# Altium PCB Back Row.PcbDoc
Units mm, origin at the board's own origin, x right, y up, seen from the top; angles counter-clockwise.
Board outline 162 x 48 mm, 8 copper layers (Top Layer, Layer 2, Layer 3, Layer 4, Layer 5, Layer 6, Layer 7, Bottom Layer), stack 1.611 mm thick; 18 components, 40 nets, 191 pads, 60 vias.
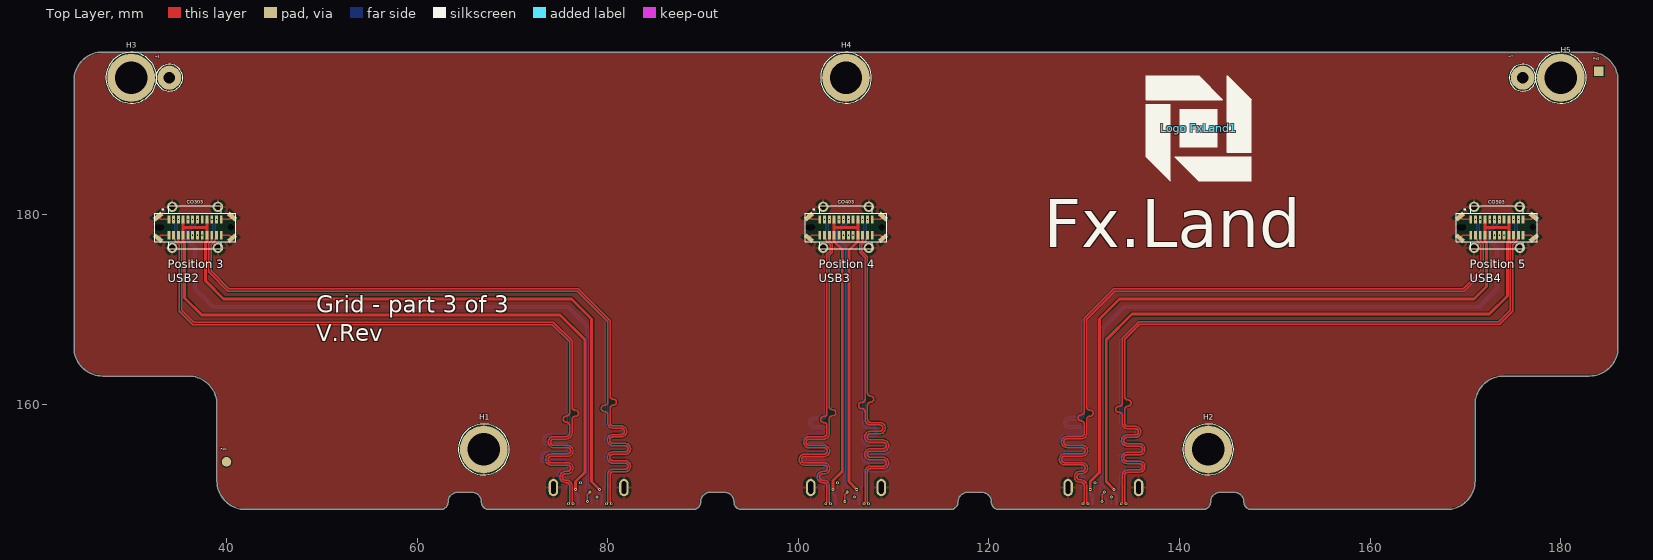
[diagram p0: Top Layer view]
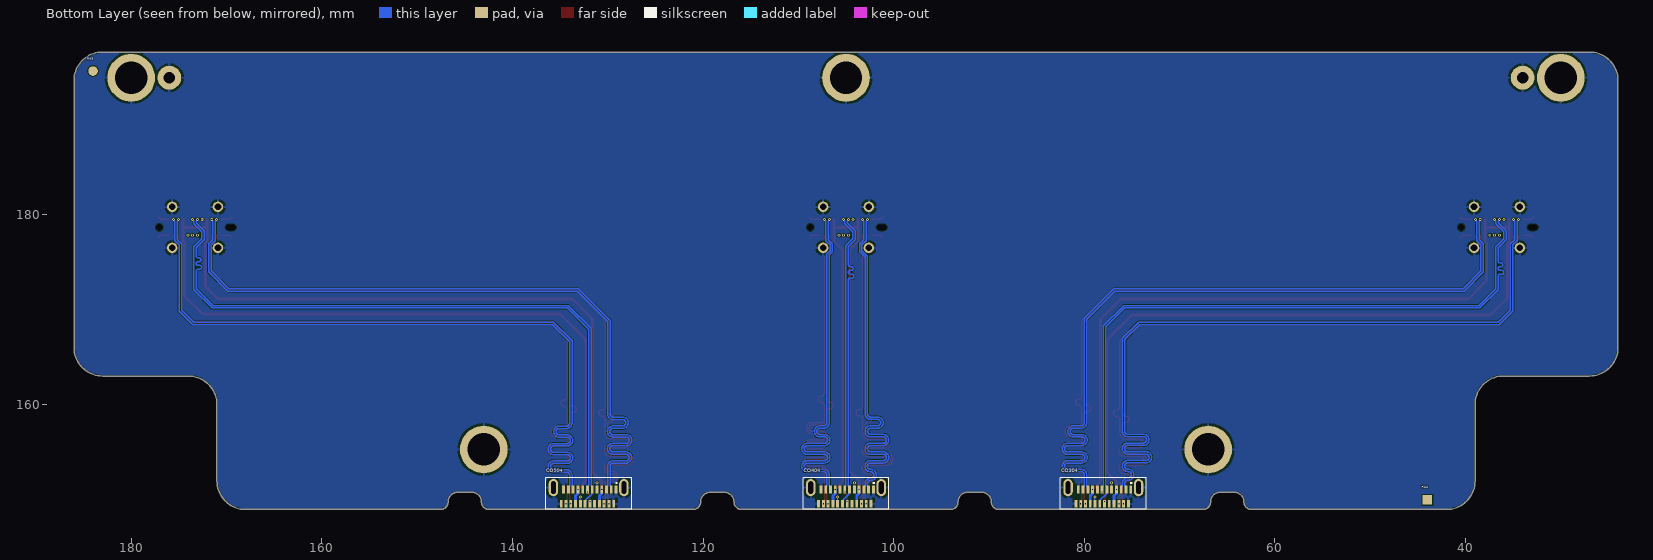
[diagram p1: Bottom Layer view, seen from below]
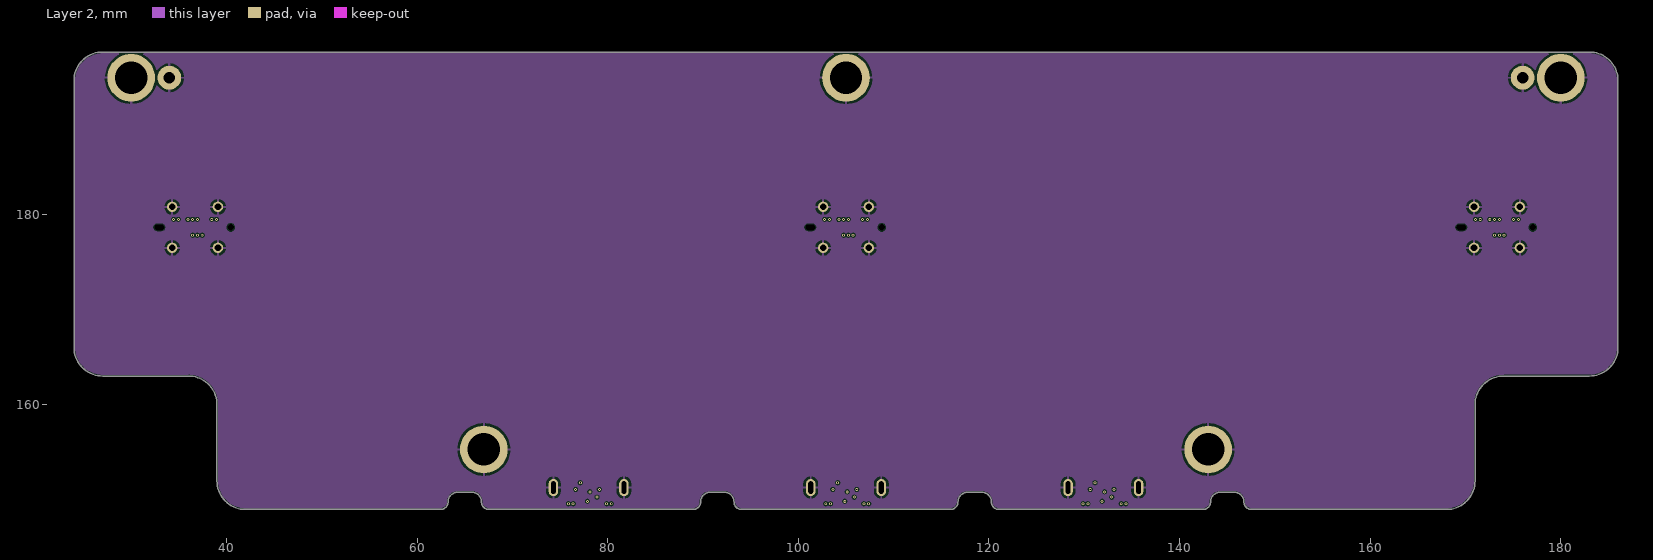
[diagram p2: Layer 2]
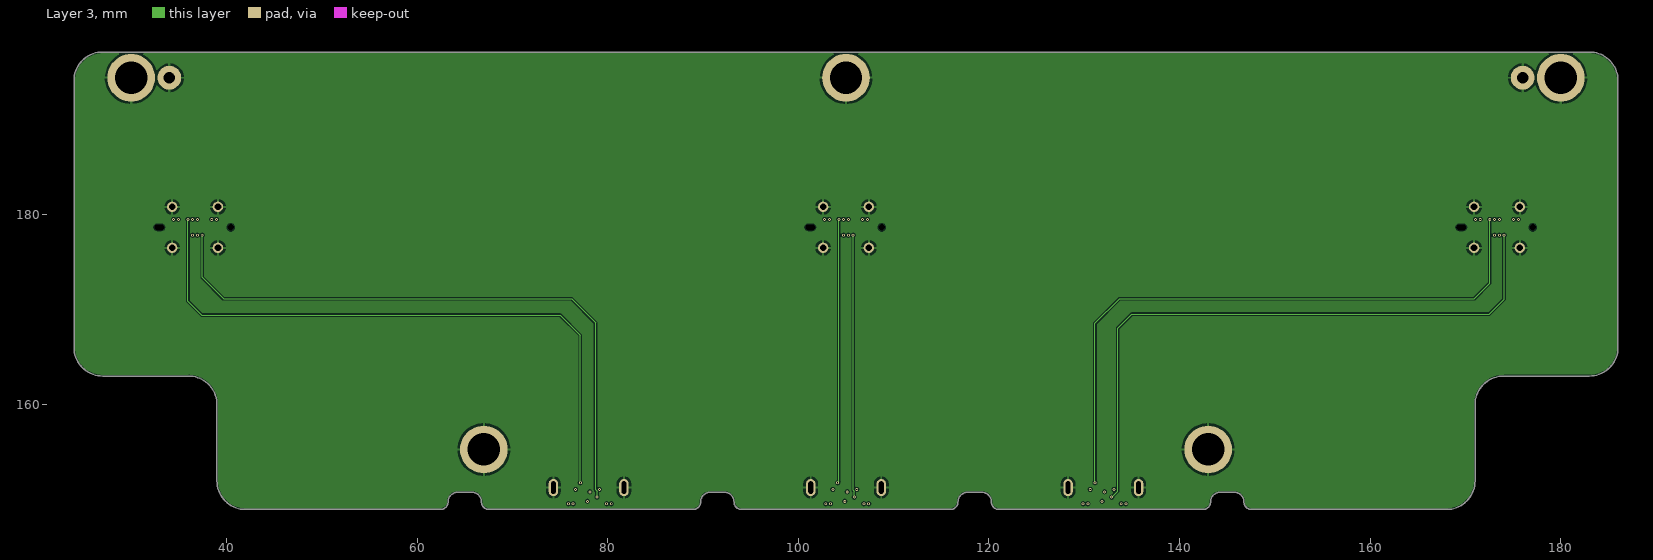
[diagram p3: Layer 3]
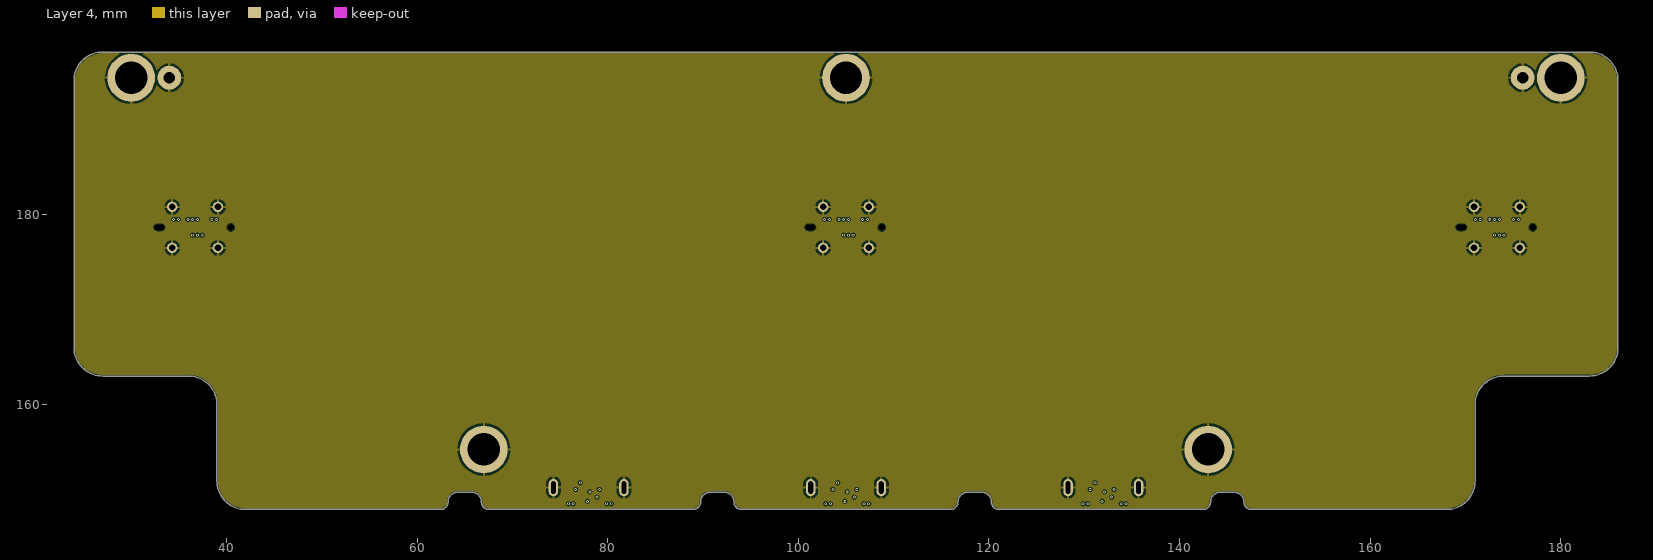
[diagram p4: Layer 4]
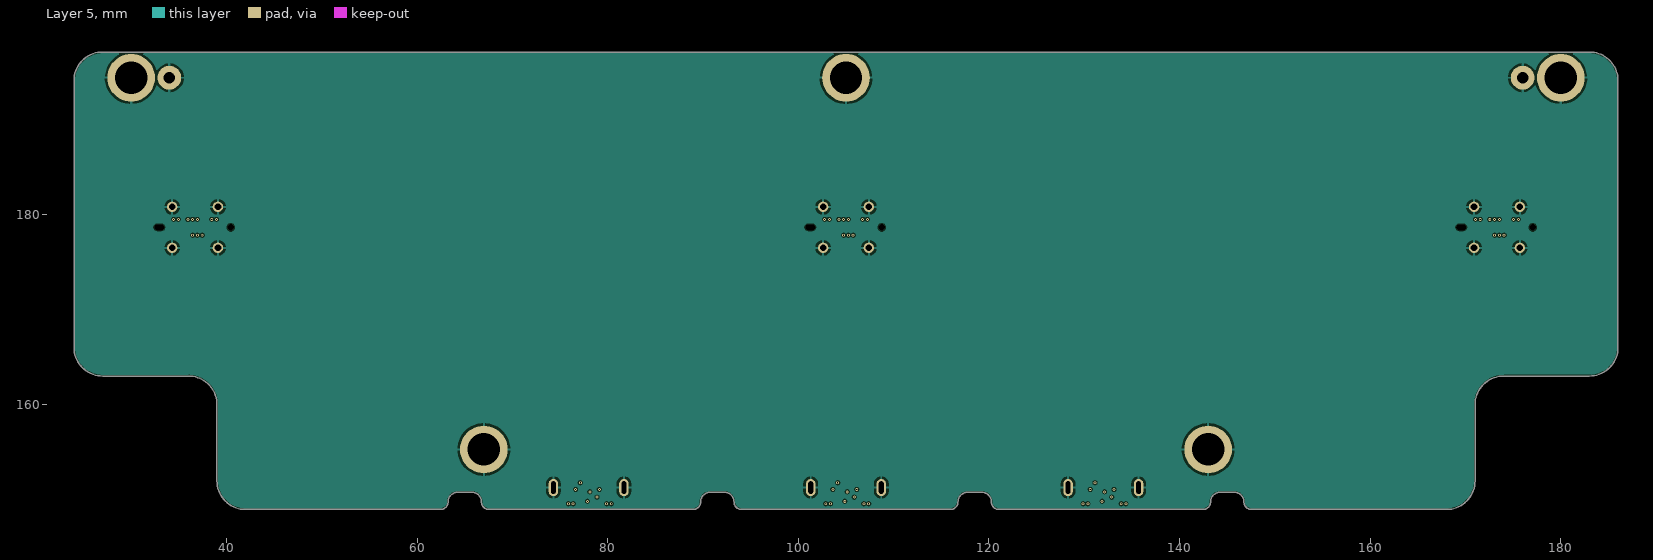
[diagram p5: Layer 5]
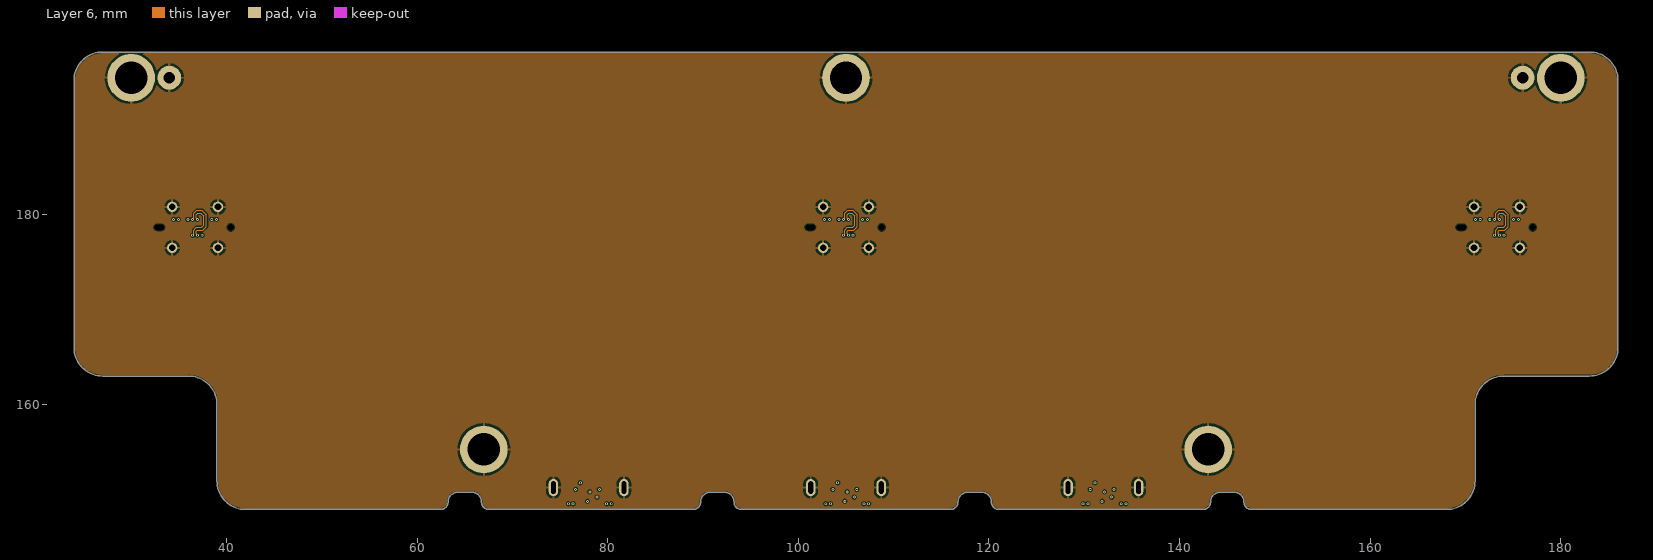
[diagram p6: Layer 6]
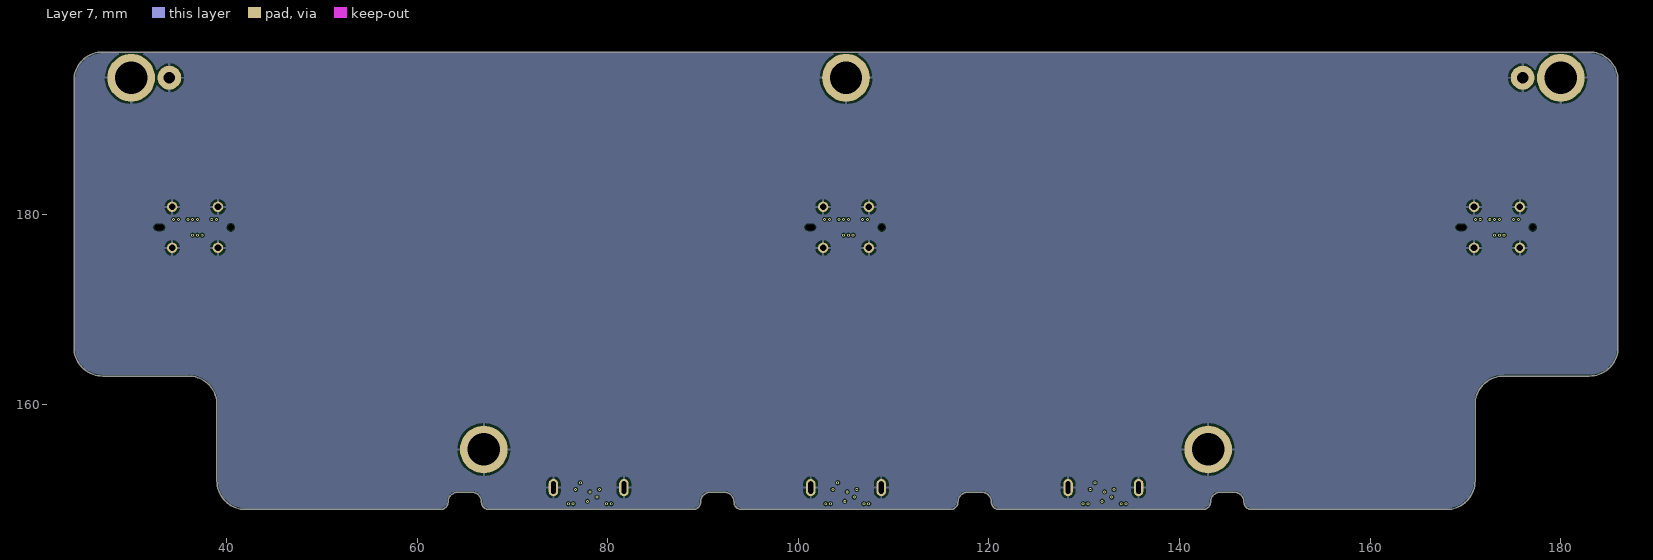
[diagram p7: Layer 7]
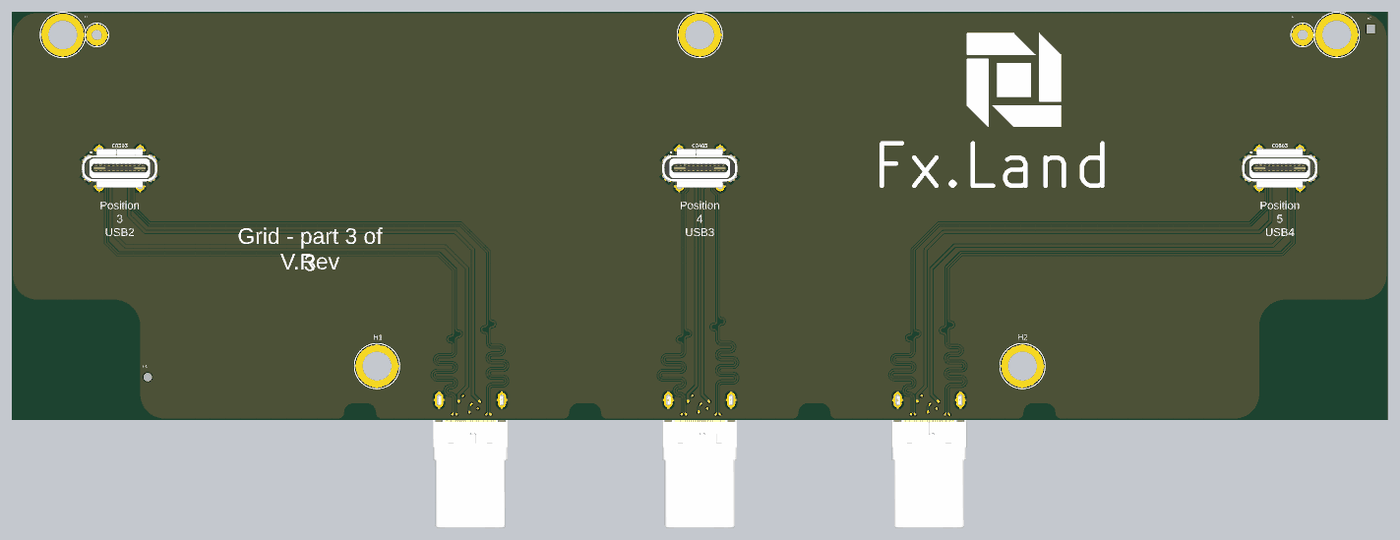
[diagram p8: 3D render of the assembled board from above, using the file's embedded part models]
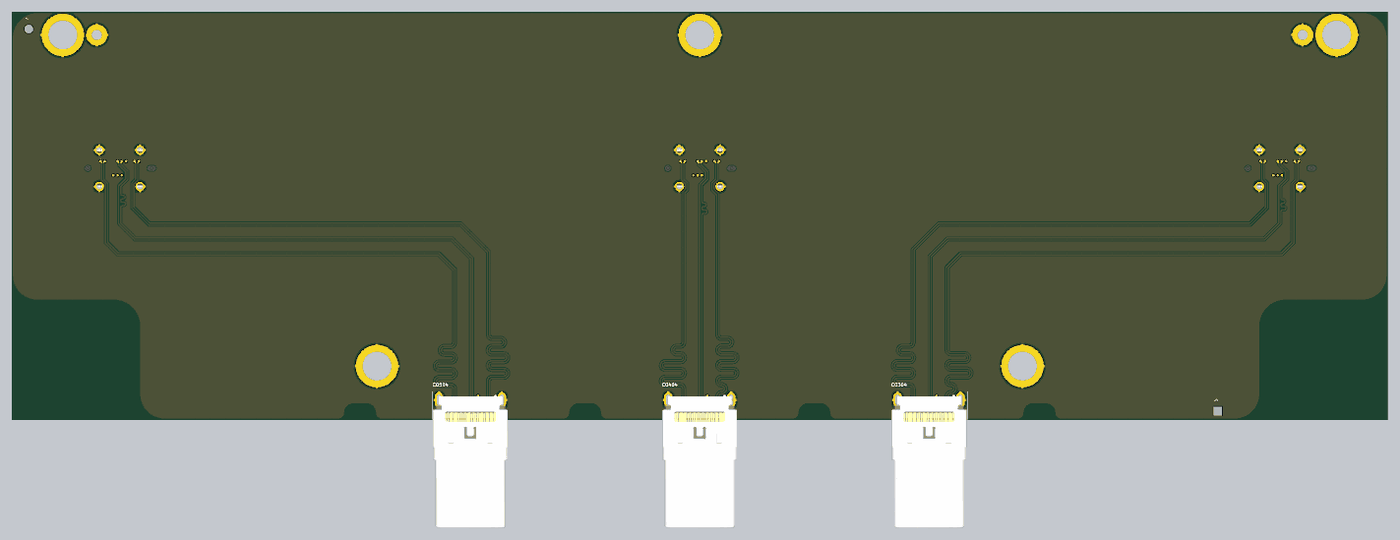
[diagram p9: 3D render of the assembled board from below, using the file's embedded part models]

## Layer stack, top to bottom
Top Solder: solder mask 0.0102, Solder Resist, Dk 3.5
Top Layer: signal copper 0.035
Dielectric 1: prepreg 0.1295, PP-017, Dk 4.3
Layer 2: signal copper 0.018
Dielectric 2: core 0.3048, Core-031, Dk 4.4
Layer 3: signal copper 0.018
Dielectric 3: prepreg 0.1295, PP-017, Dk 4.3
Layer 4: signal copper 0.018
Dielectric 4: core 0.3048, Core-031, Dk 4.4
Layer 5: signal copper 0.018
Dielectric 5: prepreg 0.1295, PP-017, Dk 4.3
Layer 6: signal copper 0.018
Dielectric 6: core 0.3048, Core-031, Dk 4.4
Layer 7: signal copper 0.018
Dielectric 7: prepreg 0.1295, PP-017, Dk 4.3
Bottom Layer: signal copper 0.035
Bottom Solder: solder mask 0.0102, Solder Resist, Dk 3.5

## Board outline
42,149 62.45,149 ccw(c62.45,149.8) 63.25,149.8 cw(c64.25,149.8) 64.25,150.8 65.75,150.8 cw(c65.75,149.8) 66.75,149.8 ccw(c67.55,149.8) 67.55,149 88.95,149 ccw(c88.95,149.8) 89.75,149.8 cw(c90.75,149.8) 90.75,150.8 92.25,150.8 cw(c92.25,149.8) 93.25,149.8 ccw(c94.05,149.8) 94.05,149 115.95,149 ccw(c115.95,149.8) 116.75,149.8 cw(c117.75,149.8) 117.75,150.8 119.25,150.8 cw(c119.25,149.8) 120.25,149.8 ccw(c121.05,149.8) 121.05,149 142.45,149 ccw(c142.45,149.8) 143.25,149.8 cw(c144.25,149.8) 144.25,150.8 145.75,150.8 cw(c145.75,149.8) 146.75,149.8 ccw(c147.55,149.8) 147.55,149 168,149 ccw(c168,152) 171,152 171,160 cw(c174,160) 174,163 183,163 ccw(c183,166) 186,166 186,194 ccw(c183,194) 183,197 27,197 ccw(c27,194) 24,194 24,166 ccw(c27,166) 27,163 36,163 cw(c36,160) 39,160 39,152 ccw(c42,152)

## Design rules (kind name [scope] priority, off if disabled: settings)
BoardOutlineClearance BoardOutlineClearanceText [OnLayer('Top Overlay')   or        OnLayer('Bottom Overlay')] p1: gap=0 ignorepadtopadclearanceinfootprint=FALSE
BoardOutlineClearance [All] p2: gap=0.127 ignorepadtopadclearanceinfootprint=FALSE except(0: Arc-SplitBarrior Arc-SplitContinuation Track-SplitBarrior Track-SplitContinuation SMDPad-SplitBarrior SMDPad-SplitContinuation THPad-SplitBarrior THPad-SplitContinuation Via-SplitBarrior Via-SplitContinuation Fill-SplitBarrior Fill-SplitContinuation Poly-SplitBarrior Poly-SplitContinuation Region-SplitBarrior Region-SplitContinuation Text-SplitBarrior Text-SplitContinuation)
Clearance Clearance_DiffPair [(InDifferentialPairClass('All Differential Pairs'))] p1: gap=0.1 ignorepadtopadclearanceinfootprint=TRUE except(0: Arc-Text Track-Text SMDPad-Text THPad-Text Via-Text Fill-Text Poly-Text Region-Text Text-Text Text-Hole)
Clearance Clearance_HighPWR [InNet('VPWR')  or   InNet('VIN') or InNet('PWR')] p2: gap=0.3 ignorepadtopadclearanceinfootprint=FALSE except(0: Arc-Text Track-Text SMDPad-Text THPad-Text Via-Text Fill-Text Poly-Text Region-Text Text-Text Text-Hole)
Clearance Clearance_MidPWR [InNet('+12V') or InNet('+5V')] p3: gap=0.2 ignorepadtopadclearanceinfootprint=TRUE except(0: Arc-Text Track-Text SMDPad-Text THPad-Text Via-Text Fill-Text Poly-Text Region-Text Text-Text Text-Hole)
Clearance Clearance_LowPWR [InNet('NetC104_1')] p4: gap=0.15 ignorepadtopadclearanceinfootprint=TRUE except(0: Arc-Text Track-Text SMDPad-Text THPad-Text Via-Text Fill-Text Poly-Text Region-Text Text-Text Text-Hole)
Clearance Clearance_DiffNets [All] p5: gap=0.105 ignorepadtopadclearanceinfootprint=TRUE except(0: Arc-Text Track-Text SMDPad-Text THPad-Text Via-Text Fill-Text Poly-Text Region-Text Text-Text Text-Hole)
Clearance Clearance_SameNets [All] p6: gap=0 ignorepadtopadclearanceinfootprint=FALSE
ComponentClearance [All] p1: gap=0 collisioncheckmode=3 verticalgap=0 showdistances=FALSE
DiffPairsRouting DiffPairsRouting_USB3 [InDifferentialPairClass('USB3')] p1: maxlimit=0.35 minlimit=0.1 mostfreqgap=0.17 toplayer_mingap=0.105 toplayer_maxgap=0.105 toplayer_prefgap=0.105 toplayer_minwidth=0.15 toplayer_maxwidth=0.15 toplayer_prefwidth=0.15 midlayer2_mingap=0.17 midlayer2_maxgap=0.17 midlayer2_minwidth=0.125 midlayer2_maxwidth=0.125 midlayer2_prefwidth=0.125 midlayer3_mingap=0.17 midlayer3_maxgap=0.17 midlayer3_minwidth=0.125 midlayer3_maxwidth=0.125 midlayer3_prefwidth=0.125 bottomlayer_mingap=0.105 bottomlayer_maxgap=0.105 bottomlayer_prefgap=0.105 bottomlayer_minwidth=0.15 bottomlayer_maxwidth=0.15 bottomlayer_prefwidth=0.15 impedanceprofiledriven=TRUE impedanceprofileid={6759D886-137E-4B91-9245-95823A6983B5} impedanceprofilevalue=90.000000 filterlayerstackid={976BEA40-2DA4-42A2-9577-73BD5A797D81} maxuncoupledlength=12.7
DiffPairsRouting DiffPairsRouting_USB [InDifferentialPairClass('USB')] p2: maxlimit=0.35 minlimit=0.1 mostfreqgap=0.17 toplayer_mingap=0.105 toplayer_maxgap=0.105 toplayer_prefgap=0.105 toplayer_minwidth=0.15 toplayer_maxwidth=0.15 toplayer_prefwidth=0.15 midlayer2_mingap=0.17 midlayer2_maxgap=0.17 midlayer2_minwidth=0.125 midlayer2_maxwidth=0.125 midlayer2_prefwidth=0.125 midlayer3_mingap=0.17 midlayer3_maxgap=0.17 midlayer3_minwidth=0.125 midlayer3_maxwidth=0.125 midlayer3_prefwidth=0.125 bottomlayer_mingap=0.105 bottomlayer_maxgap=0.105 bottomlayer_prefgap=0.105 bottomlayer_minwidth=0.15 bottomlayer_maxwidth=0.15 bottomlayer_prefwidth=0.15 impedanceprofiledriven=TRUE impedanceprofileid={6759D886-137E-4B91-9245-95823A6983B5} impedanceprofilevalue=90.000000 filterlayerstackid={976BEA40-2DA4-42A2-9577-73BD5A797D81} maxuncoupledlength=12.7
Height [All] p1: minheight=0 maxheight=100 prefheight=12.7
HoleSize [All] p1: absolutevalues=TRUE maxlimit=20 minlimit=0.025 maxpercent=80.000 minpercent=20.000
HoleToHoleClearance [All] p1: gap=0.125 allowstackedmicrovias=TRUE
MatchedLengths MatchedLengthsUSB [InDifferentialPairClass('USB3')] p1: tolerance=0.127 checknetsindiffpair=TRUE checkdiffpairvsdiffpair=FALSE checkxsignals=FALSE checkothers=FALSE
MatchedLengths MatchedLengthsUSB0 [InDifferentialPair('USB0') or InDifferentialPair('USB0_RX1') or InDifferentialPair('USB0_RX2') or InDifferentialPair('USB0_TX1') or InDifferentialPair('USB0_TX2')] p2: tolerance=1.27 checknetsindiffpair=FALSE checkdiffpairvsdiffpair=TRUE checkxsignals=TRUE checkothers=TRUE
MatchedLengths MatchedLengthsUSB1 [InDifferentialPair('USB1') or InDifferentialPair('USB1_RX1') or InDifferentialPair('USB1_RX2') or InDifferentialPair('USB1_TX1') or InDifferentialPair('USB1_TX2')] p3: tolerance=1.27 checknetsindiffpair=FALSE checkdiffpairvsdiffpair=TRUE checkxsignals=TRUE checkothers=TRUE
MatchedLengths MatchedLengthsUSB2 [InDifferentialPair('USB2') or InDifferentialPair('USB2_RX1') or InDifferentialPair('USB2_RX2') or InDifferentialPair('USB2_TX1') or InDifferentialPair('USB2_TX2')] p4: tolerance=1.27 checknetsindiffpair=FALSE checkdiffpairvsdiffpair=TRUE checkxsignals=TRUE checkothers=TRUE
MatchedLengths MatchedLengthsUSB3 [InDifferentialPair('USB3') or InDifferentialPair('USB3_RX1') or InDifferentialPair('USB3_RX2') or InDifferentialPair('USB3_TX1') or InDifferentialPair('USB3_TX2')] p5: tolerance=1.27 checknetsindiffpair=FALSE checkdiffpairvsdiffpair=TRUE checkxsignals=TRUE checkothers=TRUE
MatchedLengths MatchedLengthsUSB4 [InDifferentialPair('USB4') or InDifferentialPair('USB4_RX1') or InDifferentialPair('USB4_RX2') or InDifferentialPair('USB4_TX1') or InDifferentialPair('USB4_TX2')] p6: tolerance=1.27 checknetsindiffpair=FALSE checkdiffpairvsdiffpair=TRUE checkxsignals=TRUE checkothers=TRUE
MatchedLengths MatchedLengthsUSB5 [InDifferentialPair('USB5') or InDifferentialPair('USB5_RX1') or InDifferentialPair('USB5_RX2') or InDifferentialPair('USB5_TX1') or InDifferentialPair('USB5_TX2')] p7: tolerance=1.27 checknetsindiffpair=FALSE checkdiffpairvsdiffpair=TRUE checkxsignals=TRUE checkothers=TRUE
MatchedLengths MatchedLengthsUSB6 [InDifferentialPair('USB6') or InDifferentialPair('USB6_RX1') or InDifferentialPair('USB6_RX2') or InDifferentialPair('USB6_TX1') or InDifferentialPair('USB6_TX2')] p8: tolerance=1.27 checknetsindiffpair=FALSE checkdiffpairvsdiffpair=TRUE checkxsignals=TRUE checkothers=TRUE
MatchedLengths MatchedLengthsUSB7 [InDifferentialPair('USB7') or InDifferentialPair('USB7_RX1') or InDifferentialPair('USB7_RX2') or InDifferentialPair('USB7_TX1') or InDifferentialPair('USB7_TX2')] p9: tolerance=1.27 checknetsindiffpair=FALSE checkdiffpairvsdiffpair=TRUE checkxsignals=TRUE checkothers=TRUE
MinimumAnnularRing [All] p1: minimumring=0.1
MinimumSolderMaskSliver [All] p1: minsoldermaskwidth=0
PolygonConnect PolygonConnect_HighPWR [InNet('VPWR')  or   InNet('VIN') or InNet('PWR')] p1: connectstyle=Relief reliefconductorwidth=1.25 reliefentries=4 polygonreliefangle="90 Angle" airgapwidth=0.254
PolygonConnect PolygonConnect_MidPWR [InNet('+12V') or InNet('+5V')] p2: connectstyle=Relief reliefconductorwidth=0.7 reliefentries=4 polygonreliefangle="90 Angle" airgapwidth=0.254
PolygonConnect PolygonConnect_LowPWR [InNet('NetC104_1')] p3: connectstyle=Relief reliefconductorwidth=0.5 reliefentries=4 polygonreliefangle="90 Angle" airgapwidth=0.254
PolygonConnect [All] p4: connectstyle=Relief reliefconductorwidth=0.254 reliefentries=4 polygonreliefangle="90 Angle" airgapwidth=0.254
RoutingVias RoutingVias_DiffPair [InDifferentialPairClass('All Differential Pairs')] p1: holewidth=0.1 width=0.3 viastyle="Through Hole" minholewidth=0.1 minwidth=0.3 maxholewidth=0.5 maxwidth=0.6
RoutingVias [All] p2: holewidth=0.1 width=0.3 viastyle="Through Hole" minholewidth=0.1 minwidth=0.3 maxholewidth=6.3 maxwidth=6.9
SilkToSilkClearance [All] p1: silktosilkclearance=0
SilkToSolderMaskClearance [IsPad] p1: minsilkscreentomaskgap=0 clearancetoexposedcopper=TRUE
SolderMaskExpansion [All] p1: expansion=0.102 istentingtop=FALSE
UnRoutedNet [All] p1: checkbadconnections=TRUE
Width Width_12V [InNet('+12V')] p1: maxlimit=2 minlimit=0.75 preferedwidth=1
Width Width_VIN [InNet('VIN')] p2: maxlimit=2 minlimit=0.75 preferedwidth=1
Width Width_VPWR [InNet('VPWR')] p3: maxlimit=2 minlimit=0.5 preferedwidth=0.7
Width [All] p4: maxlimit=20 minlimit=0.1 preferedwidth=0.254
21 further rules are at their usual default settings.

## Classes and differential pairs
differential pair class USB3: USB1 USB1_RX1 USB1_RX2 USB1_TX1 USB1_TX2 USB2 USB2_RX1 USB2_RX2 USB2_TX1 USB2_TX2 USB3 USB3_RX1 USB3_RX2 USB3_TX1 USB3_TX2 USB4 USB4_RX1 USB4_RX2 USB4_TX1 USB4_TX2 USB5 USB5_RX1 USB5_RX2 USB5_TX1 USB5_TX2 USB6 USB6_RX1 USB6_RX2 USB6_TX1 USB6_TX2
component class "Grid Position 5/8": CO503 CO504
component class "Grid Position 4/8": CO403 CO404
component class "Grid Position 3/8": CO303 CO304
component class 001_OverViewGridMod3V3: Fid1 Fid2 Fid3 Fid4 H1 H2 H3 H4 H5 H6 H7 "Logo FxLand1"
differential pair USB4: +USB4_P -USB4_N
differential pair USB4_TX2: +USB4_TX2_P -USB4_TX2_N
differential pair USB4_TX1: +USB4_TX1_P -USB4_TX1_N
differential pair USB4_RX2: +USB4_RX2_P -USB4_RX2_N
differential pair USB4_RX1: +USB4_RX1_P -USB4_RX1_N
differential pair USB3: +USB3_P -USB3_N
differential pair USB3_TX2: +USB3_TX2_P -USB3_TX2_N
differential pair USB3_TX1: +USB3_TX1_P -USB3_TX1_N
differential pair USB3_RX2: +USB3_RX2_P -USB3_RX2_N
differential pair USB3_RX1: +USB3_RX1_P -USB3_RX1_N
differential pair USB2: +USB2_P -USB2_N
differential pair USB2_TX2: +USB2_TX2_P -USB2_TX2_N
differential pair USB2_TX1: +USB2_TX1_P -USB2_TX1_N
differential pair USB2_RX2: +USB2_RX2_P -USB2_RX2_N
differential pair USB2_RX1: +USB2_RX1_P -USB2_RX1_N

## Components (designator, comment, footprint, x,y, rotation, side; value= is the part's Value field where it differs from the comment)
CO303 "USB4070" USB4070-30-C 36.7,178.6 r0 top locked
CO304 "USB4155" USB4155-03-C 78,149 r180 bottom locked
CO403 "USB4070" USB4070-30-C 105,178.6 r0 top locked
CO404 "USB4155" USB4155-03-C 105,149 r180 bottom locked
CO503 "USB4070" USB4070-30-C 173.3,178.6 r0 top locked
CO504 "USB4155" USB4155-03-C 132,149 r180 bottom locked
Fid1 "Fiducial" FidR_1.0mm 40,154 r0 top
Fid2 "Fiducial" FidS_1.0mm 184,195 r0 top
Fid3 "Fiducial" FidR_1.0mm 184,195 r180 bottom
Fid4 "Fiducial" FidS_1.0mm 44,150 r180 bottom
H1 "Hole M3" HOLE_M3 67,155.3 r0 top locked
H2 "Hole M3" HOLE_M3 143,155.3 r0 top locked
H3 "Hole M3" HOLE_M3 30,194.3 r0 top locked
H4 "Hole M3" HOLE_M3 105,194.3 r0 top locked
H5 "Hole M3" HOLE_M3 180,194.3 r0 top locked
H6 "Hole 1.2mm" HOLE_1.2MM 34,194.3 r0 top locked
H7 "Hole 1.2mm" HOLE_1.2MM 176,194.3 r0 top locked
"Logo FxLand1" "FxLand" Logo_FxLand_3 142,189 r0 top

## Footprints (in the part's own frame and the unit in brackets; to place one, negate y for a bottom-side part, rotate by r counter-clockwise, add the part's x,y. Pads: shape width x height; smd on the part's side, far side on the other; paste and mask are expansions set on the pad)
FidR_1.0mm [mm]
  round 1 smd: 1(0,0)
FidS_1.0mm [mm]
  rect 1x1 smd: 1(0,0)
HOLE_1.2MM [mm]
  round 2.5 hole 1.2: 1(0,0)
  silkscreen extent -1.4,-1.4 1.4,1.4
HOLE_M3 [mm]
  round 5 hole 3.4: 1(0,0)
  silkscreen extent -2.66,-2.66 2.67,2.66
Logo_FxLand_3 [mm]
  silkscreen extent -5.5,-5.5 5.5,5.5
USB4070-30-C [mm]
  round 0 hole 0.58 slot 1 at 0 deg unplated mask+0: 0(-3.75,0)
  round 0 hole 0.66 unplated mask+0: 0(3.75,0)
  rect 0.3x0.85 smd: 1(-2.75,0.83) 2(-2.25,0.83) 3(-1.75,0.83) 4(-1.25,0.83) 5(-0.75,0.83) 6(-0.25,0.83) 7(0.25,0.83) 8(0.75,0.83) 9(1.25,0.83) 10(1.75,0.83) 11(2.25,0.83) 12(2.75,0.83) 21(2.75,-0.83) 22(2.25,-0.83) 23(1.75,-0.83) 24(1.25,-0.83) 25(0.75,-0.83) 26(0.25,-0.83) 27(-0.25,-0.83) 28(-0.75,-0.83) 29(-1.25,-0.83) 30(-1.75,-0.83) 31(-2.25,-0.83) 32(-2.75,-0.83)
  rect 0.5x1.03 smd rot 50: SH(-3.88,-1.135) SH(3.88,1.135)
  rect 0.5x1.03 smd rot 130: SH(-3.88,1.135) SH(3.88,-1.135)
  round 1.1 hole 0.7: SH(-2.4,-2.15) SH(-2.4,2.15) SH(2.4,-2.15) SH(2.4,2.15)
  silkscreen extent -4.25,-2.25 4.25,2.25, body extent -4.44,-2.27 4.43,2.28, height 10.54
USB4155-03-C [mm]
  rect 0.3x0.8 smd: 1(2.875,2.1) 2(2.375,2.1) 3(1.875,2.1) 4(1.375,2.1) 5(0.875,2.1) 6(0.375,2.1) 7(-0.125,2.1) 8(-0.625,2.1) 9(-1.125,2.1) 10(-1.625,2.1) 11(-2.125,2.1) 12(-2.625,2.1) 21(-2.875,0.6) 22(-2.375,0.6) 23(-1.875,0.6) 24(-1.375,0.6) 25(-0.875,0.6) 26(-0.375,0.6) 27(0.125,0.6) 28(0.625,0.6) 29(1.125,0.6) 30(1.625,0.6) 31(2.125,0.6) 32(2.625,0.6)
  oval 1x1.8 hole 0.5 slot 1.3 at 90 deg: SH(-3.7,2.3) SH(3.7,2.3)
  silkscreen extent -4.5,0 4.5,3.33, body extent -4.4,-12.75 4.4,2.75, height 1.6

## Part data
CO303 CO403 CO503: library part CO0021, "USB C connector Receptacle Vertical", ID=16, ManfactPart=USB4070-30-C, Part Number=CO0021, RefVal=USB4070
CO304 CO404 CO504: library part CO0031, "USB C connector Plug Horizontal", ID=30, ManfactPart=USB4155-03-C, Part Number=CO0031, RefVal=USB4155
Fid1 Fid3: library part ME0011, "Fiducial Round 1mm", ID=11, Part Number=ME0011, RefVal=Fiducial
Fid2 Fid4: library part ME0012, "Fiducial Sqaure 1mm", ID=12, Part Number=ME0012, RefVal=Fiducial
H1 H2 H3 H4 H5: library part ME0001, "Mounting Hole M3", ID=1, Part Number=ME0001, RefVal="Hole M3"
H6 H7: library part ME0025, "Mounting Hole 1.2MM", ID=25, Part Number=ME0025, RefVal="Hole 1.2mm"
"Logo FxLand1": library part ME0008, "Logo FxLand 3", ID=8, Part Number=ME0008, RefVal=FxLand

## Via types
v1: diameter 0.3, hole 0.1, Top Layer to Bottom Layer, 60 vias

## Nets (pads, with @x,y where several pads share a name; then routed paths per layer and width w, separated by ;. In a path a pad name is that pad's centre, name@x,y a point inside that pad or via, vN(x,y) a via of type N, cw(c..) or ccw(c..) an arc to the next point about the centre after c; other vN are vias at no path point)
GND: CO303.1 CO303.12 CO303.21 CO303.32 CO303.SH CO304.1 CO304.12 CO304.21 CO304.32 CO304.SH CO403.1 CO403.12 CO403.21 CO403.32 CO403.SH CO404.1 CO404.12 CO404.21 CO404.32 CO404.SH CO503.1 CO503.12 CO503.21 CO503.32 CO503.SH CO504.1 CO504.12 CO504.21 CO504.32 CO504.SH H1.1 H2.1 H3.1 H4.1 H5.1 H6.1 H7.1 | length 15.1
  Top Layer w0.15: CO303.SH@32.82,177.465 33.125,177.77 CO303.32 ; CO303.SH@32.82,179.735 33.125,179.43 CO303.1 ; CO303.21 40.275,177.77 CO303.SH@40.58,177.465 ; CO303.12 40.275,179.43 CO303.SH@40.58,179.735 ; CO403.SH@101.12,177.465 101.425,177.77 CO403.32 ; CO403.SH@101.12,179.735 101.425,179.43 CO403.1 ; CO403.21 108.575,177.77 CO403.SH@108.88,177.465 ; CO403.12 108.575,179.43 CO403.SH@108.88,179.735 ; CO503.SH@169.42,177.465 169.725,177.77 CO503.32 ; CO503.SH@169.42,179.735 169.725,179.43 CO503.1 ; CO503.21 176.875,177.77 CO503.SH@177.18,177.465 ; CO503.12 176.875,179.43 CO503.SH@177.18,179.735
USB2_5V: CO303.4 CO303.9 CO303.24 CO303.29 CO304.4 CO304.9 CO304.24 CO304.29 | length 140.8
  Top Layer w0.3: CO303.4 35.45,178.6 ; CO303.9 37.95,178.6 ; v1(76.625,151.1) 76.625,151.925 77.6,152.9 77.6,166.8 75,169.4 37.4,169.4 35.605,171.195 35.605,176.991 35.45,177.146 CO303.29 35.45,178.6 ; v1(79.125,151.1) 78.3,151.925 78.3,169 76.2,171.1 39.7,171.1 37.795,173.005 37.795,176.991 37.95,177.146 CO303.24 37.95,178.6 ; 35.45,178.6 37.95,178.6
  Bottom Layer w0.3: v1(76.625,151.1) 76.625,150.689 76.875,150.439 CO304.29 ; v1(79.125,151.1) 79.125,150.689 79.375,150.439 CO304.24
USB2_CC1: CO303.5 CO304.5 | length 67.4
  Layer 3 w0.125: v1(35.95,179.43) 35.95,170.85 37.4,169.4 75,169.4 77.125,167.275 v1(77.125,151.8)
  Bottom Layer w0.125: CO304.5 v1(77.125,151.8)
USB2_CC2: CO303.25 CO304.25 | length 66.7
  Layer 3 w0.125: v1(37.45,177.77) 37.45,173.35 39.7,171.1 76.2,171.1 78.725,168.575 78.725,151.051 78.875,150.901 v1(78.875,150.3)
  Bottom Layer w0.125: CO304.25 v1(78.875,150.3)
USB2_N: CO303.7 CO303.27 CO304.7 CO304.27 | length 73.4
  Top Layer w0.15: v1(77.875,149.85) 77.875,150.57 78.125,150.82 v1(78.125,150.85)
  Layer 6 w0.125: v1(36.45,177.77) 36.45,177.817 36.552,177.92 36.552,178.322 36.825,178.595 37.395,178.595 37.6,178.8 37.6,179.8 37.4,180 37.3,180.1 37,180.1 36.848,179.948 36.848,179.58 36.95,179.477 v1(36.95,179.43)
  Bottom Layer w0.15: v1(36.95,179.43) 36.95,179.39 36.828,179.267 36.828,178.967 36,178.139 36,177.4 36.828,176.573 36.828,172.173 38.6,170.4 75.861,170.4 78.003,168.258 78.003,151.473 78.125,151.35 CO304.7
USB2_P: CO303.6 CO303.26 CO304.6 CO304.26 | length 76.6
  Layer 6 w0.125: v1(36.45,179.43) 36.45,179.477 36.552,179.58 36.552,180.07 36.878,180.395 37.422,180.395 37.895,179.922 37.895,178.678 37.517,178.3 36.948,178.3 36.848,178.2 36.848,177.92 36.95,177.817 v1(36.95,177.77)
  Bottom Layer w0.15: v1(36.45,179.43) 36.45,179.39 36.572,179.267 36.572,179.073 35.745,178.245 35.745,177.294 36.572,176.467 36.572,176.1 36.572,175.091 cw(c36.371,175.091) 36.371,174.889 36.285,174.889 ccw(c36.285,174.687) 36.083,174.687 ccw(c36.285,174.687) 36.285,174.485 36.371,174.485 cw(c36.371,174.283) 36.572,174.283 cw(c36.371,174.283) 36.371,174.081 36.184,174.081 ccw(c36.184,173.879) 35.982,173.879 ccw(c36.184,173.879) 36.184,173.677 36.371,173.677 cw(c36.371,173.475) 36.572,173.475 36.572,173.4 36.572,172.067 38.494,170.145 75.755,170.145 77.748,168.152 77.748,151.473 77.625,151.35 CO304.6 77.7,151.025 77.7,150.6 78.3,150 78.3,149.675 CO304.26
USB2_RX1_N: CO303.30 CO304.30 | length 77.9
  Top Layer w0.15: CO303.30 34.928,177.748 34.928,177.208 35.28,176.856 35.28,169.92 36.545,168.655 74.306,168.655 76.252,166.708 76.252,160.203 76.252,159.751 ccw(c76.581,159.751) 76.581,159.422 76.609,159.422 cw(c76.609,159.093) 76.938,159.093 cw(c76.609,159.093) 76.609,158.764 76.581,158.764 ccw(c76.581,158.435) 76.252,158.435 76.252,157.702 76.252,157.676 76.252,156.979 cw(c75.668,156.979) 75.668,156.395 74.342,156.395 ccw(c74.342,156.066) 74.342,155.737 75.781,155.737 cw(c75.781,155.153) 75.781,154.569 74.064,154.569 ccw(c74.064,154.24) 74.064,153.911 75.781,153.911 cw(c75.781,153.327) 75.781,152.743 75.559,152.743 ccw(c75.559,152.414) 75.559,152.085 75.668,152.085 cw(c75.668,151.501) 76.252,151.501 76.252,151.298 76.252,149.763 76.375,149.64 v1(76.375,149.6)
USB2_RX1_P: CO303.31 CO304.31 | length 78
  Top Layer w0.15: CO303.31 34.45,177.495 34.625,177.32 34.625,177.15 35.025,176.75 35.025,169.814 36.439,168.4 74.2,168.4 75.997,166.603 75.997,159.583 75.997,159.135 cw(c75.668,159.135) 75.668,158.806 ccw(c75.668,158.477) 75.339,158.477 ccw(c75.668,158.477) 75.668,158.148 cw(c75.668,157.819) 75.997,157.819 75.997,157.744 75.997,157.676 75.997,156.979 cw(c75.668,156.979) 75.668,156.65 74.342,156.65 ccw(c74.342,156.066) 74.342,155.482 75.781,155.482 cw(c75.781,155.153) 75.781,154.824 74.064,154.824 ccw(c74.064,154.24) 74.064,153.656 75.781,153.656 cw(c75.781,153.327) 75.781,152.998 75.559,152.998 ccw(c75.559,152.414) 75.559,151.83 75.668,151.83 cw(c75.668,151.501) 75.997,151.501 75.997,151.298 75.997,149.763 75.875,149.64 v1(75.875,149.6)
USB2_RX2_N: CO303.10 CO304.10 | length 78
  Bottom Layer w0.15: v1(38.45,179.43) 38.45,179.39 38.572,179.267 38.572,177.308 38.12,176.856 38.12,173.919 40.139,171.9 76.8,171.9 79.748,168.952 79.748,159.404 79.747,158.775 79.747,158.105 ccw(c80.331,158.105) 80.331,157.521 81.144,157.521 cw(c81.144,157.192) 81.144,156.863 80.276,156.863 ccw(c80.276,156.279) 80.276,155.695 81.742,155.695 cw(c81.742,155.366) 81.742,155.037 80.276,155.037 ccw(c80.276,154.453) 80.276,153.869 81.742,153.869 cw(c81.742,153.54) 81.742,153.211 80.331,153.211 ccw(c80.331,152.627) 79.747,152.627 79.747,151.512 79.747,151.473 79.625,151.35 CO304.10
USB2_RX2_P: CO303.11 CO304.11 | length 78
  Bottom Layer w0.15: v1(38.95,179.43) 38.95,179.39 38.827,179.267 38.827,177.203 38.375,176.75 38.375,174.025 40.245,172.155 76.906,172.155 80.003,169.058 80.003,159.404 80.002,158.775 80.002,158.105 ccw(c80.331,158.105) 80.331,157.776 81.144,157.776 cw(c81.144,157.192) 81.144,156.608 80.276,156.608 ccw(c80.276,156.279) 80.276,155.95 81.742,155.95 cw(c81.742,155.366) 81.742,154.782 80.276,154.782 ccw(c80.276,154.453) 80.276,154.124 81.742,154.124 cw(c81.742,153.54) 81.742,152.956 80.331,152.956 ccw(c80.331,152.627) 80.002,152.627 80.002,151.512 80.002,151.473 80.125,151.35 CO304.11
USB2_TX1_N: CO303.3 CO304.3 | length 78
  Bottom Layer w0.15: v1(34.95,179.43) 34.95,179.39 34.828,179.267 34.828,177.308 35.28,176.856 35.28,169.92 36.545,168.655 74.306,168.655 76.003,166.958 76.003,157.891 76.003,157.217 cw(c75.419,157.217) 75.419,156.633 73.782,156.633 ccw(c73.782,156.304) 73.782,155.975 75.442,155.975 cw(c75.442,155.391) 75.442,154.807 73.514,154.807 ccw(c73.514,154.478) 73.514,154.149 75.442,154.149 cw(c75.442,153.565) 75.442,152.981 75.396,152.981 ccw(c75.396,152.652) 75.396,152.323 75.419,152.323 cw(c75.419,151.739) 76.003,151.739 76.003,151.536 76.003,151.473 76.125,151.35 CO304.3
USB2_TX1_P: CO303.2 CO304.2 | length 78
  Bottom Layer w0.15: v1(34.45,179.43) 34.45,179.39 34.573,179.267 34.573,177.203 35.025,176.75 35.025,169.814 36.439,168.4 74.2,168.4 75.748,166.852 75.748,157.891 75.748,157.217 cw(c75.419,157.217) 75.419,156.888 73.782,156.888 ccw(c73.782,156.304) 73.782,155.72 75.442,155.72 cw(c75.442,155.391) 75.442,155.062 73.514,155.062 ccw(c73.514,154.478) 73.514,153.894 75.442,153.894 cw(c75.442,153.565) 75.442,153.236 75.396,153.236 ccw(c75.396,152.652) 75.396,152.068 75.419,152.068 cw(c75.419,151.739) 75.748,151.739 75.748,151.536 75.748,151.473 75.625,151.35 CO304.2
USB2_TX2_N: CO303.23 CO304.23 | length 77.9
  Top Layer w0.15: CO303.23 38.472,177.748 38.472,177.208 38.12,176.856 38.12,173.919 40.139,171.9 76.8,171.9 79.997,168.703 79.997,160.685 79.997,160.259 cw(c79.668,160.259) 79.668,159.93 79.641,159.93 ccw(c79.641,159.601) 79.312,159.601 ccw(c79.641,159.601) 79.641,159.272 79.668,159.272 cw(c79.668,158.943) 79.997,158.943 79.997,158.868 79.997,158.858 79.997,158.103 ccw(c80.581,158.103) 80.581,157.519 81.409,157.519 cw(c81.409,157.19) 81.409,156.861 80.534,156.861 ccw(c80.534,156.277) 80.534,155.693 81.82,155.693 cw(c81.82,155.364) 81.82,155.035 80.534,155.035 ccw(c80.534,154.451) 80.534,153.867 81.82,153.867 cw(c81.82,153.538) 81.82,153.209 80.581,153.209 ccw(c80.581,152.625) 79.997,152.625 79.997,151.509 79.997,149.763 79.875,149.64 v1(79.875,149.6)
USB2_TX2_P: CO303.22 CO304.22 | length 78
  Top Layer w0.15: CO303.22 38.95,177.495 38.775,177.32 38.775,177.15 38.375,176.75 38.375,174.025 40.245,172.155 76.906,172.155 80.252,168.808 80.252,161.484 80.252,160.917 ccw(c80.581,160.917) 80.581,160.588 cw(c80.582,160.259) 80.911,160.259 cw(c80.582,160.259) 80.582,159.93 ccw(c80.581,159.601) 80.252,159.601 80.252,158.868 80.252,158.858 80.252,158.103 ccw(c80.581,158.103) 80.581,157.774 81.409,157.774 cw(c81.409,157.19) 81.409,156.606 80.534,156.606 ccw(c80.534,156.277) 80.534,155.948 81.82,155.948 cw(c81.82,155.364) 81.82,154.78 80.534,154.78 ccw(c80.534,154.451) 80.534,154.122 81.82,154.122 cw(c81.82,153.538) 81.82,152.954 80.581,152.954 ccw(c80.581,152.625) 80.252,152.625 80.252,151.509 80.252,149.763 80.375,149.64 v1(80.375,149.6)
USB3_5V: CO403.4 CO403.9 CO403.24 CO403.29 CO404.4 CO404.9 CO404.24 CO404.29 | length 63.9
  Top Layer w0.3: v1(103.625,151.1) 103.625,152.025 104.6,153 104.6,176.296 103.75,177.146 CO403.29 103.75,178.6 ; CO403.4 103.75,178.6 ; v1(106.125,151.1) 105.3,151.925 105.3,176.196 106.25,177.146 CO403.24 106.25,178.6 ; CO403.9 106.25,178.6 ; 103.75,178.6 106.25,178.6
  Bottom Layer w0.3: v1(103.625,151.1) 103.625,150.689 103.875,150.439 CO404.29 ; v1(106.125,151.1) 106.125,150.689 106.375,150.439 CO404.24
USB3_CC1: CO403.5 CO404.5 | length 28.4
  Layer 3 w0.125: v1(104.125,151.8) 104.125,151.836 104.25,151.961 ; v1(104.25,179.43) 104.25,151.976 104.257,151.968
  Bottom Layer w0.125: CO404.5 v1(104.125,151.8)
USB3_CC2: CO403.25 CO404.25 | length 28.2
  Layer 3 w0.125: v1(105.75,177.77) 105.75,151.026 105.875,150.901 v1(105.875,150.3)
  Bottom Layer w0.125: CO404.25 v1(105.875,150.3)
USB3_N: CO403.7 CO403.27 CO404.7 CO404.27 | length 34.5
  Top Layer w0.15: v1(104.875,149.85) 104.875,150.57 105.125,150.82 v1(105.125,150.85)
  Layer 6 w0.125: v1(104.75,177.77) 104.75,177.817 104.853,177.92 104.853,178.322 105.125,178.595 105.695,178.595 105.9,178.8 105.9,179.8 105.7,180 105.6,180.1 105.3,180.1 105.148,179.948 105.148,179.58 105.25,179.477 v1(105.25,179.43)
  Bottom Layer w0.15: CO404.7 105.125,151.35 105.003,151.473 105.003,176.698 104.3,177.4 104.3,178.139 105.128,178.967 105.128,179.267 105.25,179.39 v1(105.25,179.43)
USB3_P: CO403.6 CO403.26 CO404.6 CO404.26 | length 37.7
  Layer 6 w0.125: v1(104.75,179.43) 104.75,179.477 104.853,179.58 104.853,180.07 105.178,180.395 105.722,180.395 106.195,179.922 106.195,178.678 105.817,178.3 105.248,178.3 105.148,178.2 105.148,177.92 105.25,177.817 v1(105.25,177.77)
  Bottom Layer w0.15: v1(104.75,179.43) 104.75,179.39 104.873,179.267 104.873,179.073 104.045,178.245 104.045,177.294 104.748,176.592 104.748,176.1 104.748,174.691 cw(c104.546,174.691) 104.546,174.489 104.454,174.489 ccw(c104.454,174.287) 104.252,174.287 ccw(c104.454,174.287) 104.454,174.085 104.546,174.085 cw(c104.546,173.883) 104.748,173.883 cw(c104.546,173.883) 104.546,173.681 104.365,173.681 ccw(c104.365,173.479) 104.163,173.479 ccw(c104.365,173.479) 104.365,173.277 104.546,173.277 cw(c104.546,173.075) 104.748,173.075 104.748,173 104.748,151.473 104.625,151.35 CO404.6 104.7,151.025 104.7,150.6 105.3,150 105.3,149.675 CO404.26
USB3_RX1_N: CO403.30 CO404.30 | length 39.9
  Top Layer w0.15: CO403.30 103.228,177.748 103.228,177.208 103.58,176.856 103.58,175.98 103.253,175.653 103.253,160.9 103.253,159.807 ccw(c103.581,159.807) 103.581,159.478 103.609,159.478 cw(c103.609,159.149) 103.938,159.149 cw(c103.609,159.149) 103.609,158.82 103.581,158.82 ccw(c103.581,158.491) 103.253,158.491 103.253,157.758 103.253,157.709 103.253,156.969 cw(c102.669,156.969) 102.669,156.385 101.14,156.385 ccw(c101.14,156.056) 101.14,155.727 102.706,155.727 cw(c102.706,155.143) 102.706,154.559 100.677,154.559 ccw(c100.677,154.23) 100.677,153.901 102.706,153.901 cw(c102.706,153.317) 102.706,152.733 102.559,152.733 ccw(c102.559,152.404) 102.559,152.075 102.669,152.075 cw(c102.669,151.491) 103.253,151.491 103.253,151.288 103.253,149.763 103.375,149.64 v1(103.375,149.6)
USB3_RX1_P: CO403.31 CO404.31 | length 39.9
  Top Layer w0.15: CO403.31 102.75,177.495 102.925,177.32 102.925,177.15 103.325,176.75 103.325,176.086 102.998,175.758 102.998,159.862 102.998,159.101 cw(c102.669,159.101) 102.669,158.772 ccw(c102.668,158.443) 102.339,158.443 ccw(c102.668,158.443) 102.668,158.114 cw(c102.669,157.785) 102.998,157.785 102.998,157.71 ; v1(102.875,149.6) 102.875,149.64 102.998,149.763 102.998,151.288 102.998,151.491 ccw(c102.669,151.491) 102.669,151.82 102.559,151.82 cw(c102.559,152.404) 102.559,152.988 102.706,152.988 ccw(c102.706,153.317) 102.706,153.646 100.677,153.646 cw(c100.677,154.23) 100.677,154.814 102.706,154.814 ccw(c102.706,155.143) 102.706,155.472 101.14,155.472 cw(c101.14,156.056) 101.14,156.64 102.669,156.64 ccw(c102.669,156.969) 102.998,156.969 102.998,157.709
USB3_RX2_N: CO403.10 CO404.10 | length 39.9
  Bottom Layer w0.15: CO404.10 106.625,151.35 106.748,151.473 106.748,151.515 106.748,152.63 cw(c107.331,152.63) 107.331,153.214 109.06,153.214 ccw(c109.06,153.543) 109.06,153.872 107.263,153.872 cw(c107.263,154.456) 107.263,155.04 109.06,155.04 ccw(c109.06,155.369) 109.06,155.698 107.263,155.698 cw(c107.263,156.282) 107.263,156.866 107.735,156.866 ccw(c107.735,157.195) 107.735,157.524 107.331,157.524 cw(c107.331,158.108) 106.748,158.108 106.748,159.706 106.748,175.717 106.42,176.044 106.42,176.856 106.872,177.308 106.872,179.267 106.75,179.39 v1(106.75,179.43)
USB3_RX2_P: CO403.11 CO404.11 | length 39.9
  Bottom Layer w0.15: CO404.11 107.125,151.35 107.003,151.473 107.003,151.515 107.003,152.63 cw(c107.331,152.63) 107.331,152.959 109.06,152.959 ccw(c109.06,153.543) 109.06,154.127 107.263,154.127 cw(c107.263,154.456) 107.263,154.785 109.06,154.785 ccw(c109.06,155.369) 109.06,155.953 107.263,155.953 cw(c107.263,156.282) 107.263,156.611 107.735,156.611 ccw(c107.735,157.195) 107.735,157.779 107.331,157.779 cw(c107.331,158.108) 107.003,158.108 107.003,159.706 107.003,175.822 106.675,176.15 106.675,176.75 107.127,177.203 107.127,179.267 107.25,179.39 v1(107.25,179.43)
USB3_TX1_N: CO403.3 CO404.3 | length 39.9
  Bottom Layer w0.15: CO404.3 103.125,151.35 103.003,151.473 103.003,151.519 103.003,151.721 ccw(c102.419,151.721) 102.419,152.305 102.414,152.305 cw(c102.414,152.634) 102.414,152.963 102.424,152.963 ccw(c102.424,153.547) 102.424,154.131 101.085,154.131 cw(c101.085,154.46) 101.085,154.789 102.424,154.789 ccw(c102.424,155.373) 102.424,155.957 101.085,155.957 cw(c101.085,156.286) 101.085,156.615 102.424,156.615 ccw(c102.424,157.199) 102.424,157.783 101.684,157.783 cw(c101.684,158.112) 101.684,158.441 102.419,158.441 ccw(c102.419,159.025) 103.003,159.025 103.003,160.171 103.003,175.467 103.58,176.044 103.58,176.856 103.128,177.308 103.128,179.267 103.25,179.39 v1(103.25,179.43)
USB3_TX1_P: CO403.2 CO404.2 | length 39.9
  Bottom Layer w0.15: CO404.2 102.625,151.35 102.748,151.473 102.748,151.519 102.748,151.721 ccw(c102.419,151.721) 102.419,152.05 102.414,152.05 cw(c102.414,152.634) 102.414,153.218 102.424,153.218 ccw(c102.424,153.547) 102.424,153.876 101.085,153.876 cw(c101.085,154.46) 101.085,155.044 102.424,155.044 ccw(c102.424,155.373) 102.424,155.702 101.085,155.702 cw(c101.085,156.286) 101.085,156.87 102.424,156.87 ccw(c102.424,157.199) 102.424,157.528 101.684,157.528 cw(c101.684,158.112) 101.684,158.696 102.419,158.696 ccw(c102.419,159.025) 102.748,159.025 102.748,160.171 102.748,175.572 103.325,176.15 103.325,176.75 102.873,177.203 102.873,179.267 102.75,179.39 v1(102.75,179.43)
USB3_TX2_N: CO403.23 CO404.23 | length 39.9
  Top Layer w0.15: CO403.23 106.772,177.748 106.772,177.208 106.42,176.856 106.42,175.98 106.998,175.402 106.998,161.1 106.998,160.57 cw(c106.669,160.57) 106.669,160.241 106.641,160.241 ccw(c106.641,159.912) 106.312,159.912 ccw(c106.641,159.912) 106.641,159.583 106.669,159.583 cw(c106.669,159.254) 106.998,159.254 106.998,159.179 106.998,158.451 ccw(c107.581,158.451) 107.581,157.867 108.552,157.867 cw(c108.552,157.538) 108.552,157.209 107.558,157.209 ccw(c107.558,156.625) 107.558,156.041 108.899,156.041 cw(c108.899,155.712) 108.899,155.383 107.558,155.383 ccw(c107.558,154.799) 107.558,154.215 108.899,154.215 cw(c108.899,153.886) 108.899,153.557 107.581,153.557 ccw(c107.581,152.973) 106.998,152.973 106.998,151.857 106.997,149.763 106.875,149.64 v1(106.875,149.6)
USB3_TX2_P: CO403.22 CO404.22 | length 39.9
  Top Layer w0.15: CO403.22 107.25,177.495 107.075,177.32 107.075,177.15 106.675,176.75 106.675,176.086 107.253,175.508 107.253,161.703 107.253,161.228 ccw(c107.581,161.228) 107.581,160.899 cw(c107.582,160.57) 107.911,160.57 cw(c107.582,160.57) 107.582,160.241 ccw(c107.581,159.912) 107.253,159.912 107.253,159.179 107.253,158.451 ccw(c107.581,158.451) 107.581,158.122 108.552,158.122 cw(c108.552,157.538) 108.552,156.954 107.558,156.954 ccw(c107.558,156.625) 107.558,156.296 108.899,156.296 cw(c108.899,155.712) 108.899,155.128 107.558,155.128 ccw(c107.558,154.799) 107.558,154.47 108.899,154.47 cw(c108.899,153.886) 108.899,153.302 107.581,153.302 ccw(c107.581,152.973) 107.253,152.973 107.253,151.857 107.253,149.763 107.375,149.64 v1(107.375,149.6)
USB4_5V: CO503.4 CO503.9 CO503.24 CO503.29 CO504.4 CO504.9 CO504.24 CO504.29 | length 141.3
  Top Layer w0.3: v1(130.625,151.1) 130.625,151.925 131.6,152.9 131.6,169 133.7,171.1 170.9,171.1 172.205,172.405 172.205,176.991 172.05,177.146 CO503.29 172.05,178.6 ; v1(133.125,151.1) 132.3,151.925 132.3,166.8 135,169.5 172.5,169.5 174.395,171.395 174.395,176.991 174.55,177.146 CO503.24 174.55,178.6 ; CO503.4 172.05,178.6 ; CO503.9 174.55,178.6 ; 172.05,178.6 174.55,178.6
  Bottom Layer w0.3: v1(130.625,151.1) 130.625,150.689 130.875,150.439 CO504.29 ; v1(133.125,151.1) 133.125,150.689 133.375,150.439 CO504.24
USB4_CC1: CO503.5 CO504.5 | length 67.3
  Layer 3 w0.125: v1(131.125,151.8) 131.125,168.525 133.7,171.1 170.9,171.1 172.55,172.75 v1(172.55,179.43)
  Bottom Layer w0.125: CO504.5 v1(131.125,151.8)
USB4_CC2: CO503.25 CO504.25 | length 67.2
  Layer 3 w0.125: v1(132.875,150.3) 133.5,150.925 133.5,168 135,169.5 172.5,169.5 174.05,171.05 v1(174.05,177.77)
  Bottom Layer w0.125: CO504.25 v1(132.875,150.3)
USB4_N: CO503.7 CO503.27 CO504.7 CO504.27 | length 73.5
  Top Layer w0.15: v1(131.875,149.85) 131.875,150.57 132.125,150.82 v1(132.125,150.85)
  Layer 6 w0.125: v1(173.05,177.77) 173.05,177.817 173.152,177.92 173.152,178.322 173.425,178.595 173.995,178.595 174.2,178.8 174.2,179.8 174,180 173.9,180.1 173.6,180.1 173.447,179.948 173.447,179.58 173.55,179.477 v1(173.55,179.43)
  Bottom Layer w0.15: CO504.7 132.125,151.35 132.003,151.473 132.003,167.903 134.245,170.145 171.506,170.145 173.428,172.067 173.428,176.572 172.6,177.4 172.6,178.139 173.427,178.967 173.427,179.267 173.55,179.39 v1(173.55,179.43)
USB4_P: CO503.6 CO503.26 CO504.6 CO504.26 | length 76.7
  Layer 6 w0.125: v1(173.05,179.43) 173.05,179.477 173.152,179.58 173.152,180.07 173.478,180.395 174.022,180.395 174.495,179.922 174.495,178.678 174.117,178.3 173.547,178.3 173.447,178.2 173.447,177.92 173.55,177.817 v1(173.55,177.77)
  Bottom Layer w0.15: CO504.26 132.3,149.675 132.3,150 131.7,150.6 131.7,151.025 CO504.6 131.625,151.35 131.748,151.473 131.748,168.008 134.139,170.4 171.4,170.4 173.172,172.173 173.173,173.926 173.173,174.001 ccw(c172.971,174.001) 172.971,174.203 172.798,174.203 cw(c172.798,174.405) 172.596,174.405 cw(c172.798,174.405) 172.798,174.607 172.971,174.607 ccw(c172.971,174.809) 173.173,174.809 ccw(c172.971,174.809) 172.971,175.011 172.871,175.011 cw(c172.871,175.213) 172.669,175.213 cw(c172.871,175.213) 172.871,175.415 172.971,175.415 ccw(c172.971,175.617) 173.173,175.617 173.173,176.1 173.173,176.467 172.345,177.294 172.345,178.245 173.172,179.073 173.172,179.267 173.05,179.39 v1(173.05,179.43)
USB4_RX1_N: CO503.30 CO504.30 | length 78
  Top Layer w0.15: v1(130.375,149.6) 130.375,149.64 130.253,149.763 130.253,151.316 130.253,151.518 ccw(c129.669,151.518) 129.669,152.102 129.559,152.102 cw(c129.559,152.431) 129.559,152.76 129.766,152.76 ccw(c129.766,153.344) 129.766,153.928 127.948,153.928 cw(c127.948,154.257) 127.948,154.586 129.766,154.586 ccw(c129.766,155.17) 129.766,155.754 128.189,155.754 cw(c128.189,156.083) 128.189,156.412 129.669,156.412 ccw(c129.669,156.996) 130.253,156.996 130.253,157.696 130.253,157.714 130.253,158.447 cw(c130.581,158.447) 130.581,158.776 130.609,158.776 ccw(c130.609,159.105) 130.938,159.105 ccw(c130.609,159.105) 130.609,159.434 130.581,159.434 cw(c130.581,159.763) 130.253,159.763 130.253,160.199 130.253,168.952 133.2,171.9 169.861,171.9 171.88,173.919 171.88,176.856 171.528,177.208 171.528,177.748 CO503.30
USB4_RX1_P: CO503.31 CO504.31 | length 78.1
  Top Layer w0.15: v1(129.875,149.6) 129.875,149.64 129.997,149.763 129.997,151.316 129.997,151.518 ccw(c129.669,151.518) 129.669,151.847 129.559,151.847 cw(c129.559,152.431) 129.559,153.015 129.766,153.015 ccw(c129.766,153.344) 129.766,153.673 127.948,153.673 cw(c127.948,154.257) 127.948,154.841 129.766,154.841 ccw(c129.766,155.17) 129.766,155.499 128.189,155.499 cw(c128.189,156.083) 128.189,156.667 129.669,156.667 ccw(c129.669,156.996) 129.997,156.996 129.997,157.696 129.997,157.882 129.997,157.957 ccw(c129.669,157.957) 129.669,158.286 cw(c129.668,158.615) 129.339,158.615 cw(c129.668,158.615) 129.668,158.944 ccw(c129.669,159.273) 129.997,159.273 129.997,159.709 129.997,169.058 133.094,172.155 169.755,172.155 171.625,174.025 171.625,176.75 171.225,177.15 171.225,177.32 171.05,177.495 CO503.31
USB4_RX2_N: CO503.10 CO504.10 | length 78.1
  Bottom Layer w0.15: CO504.10 133.625,151.35 133.747,151.473 133.747,151.477 133.747,152.593 cw(c134.331,152.593) 134.331,153.177 135.676,153.177 ccw(c135.676,153.506) 135.676,153.835 134.247,153.835 cw(c134.247,154.419) 134.247,155.003 135.676,155.003 ccw(c135.676,155.332) 135.676,155.661 134.247,155.661 cw(c134.247,156.245) 134.247,156.829 135.084,156.829 ccw(c135.084,157.158) 135.084,157.487 134.331,157.487 cw(c134.331,158.071) 133.747,158.071 133.747,158.908 133.747,166.708 135.694,168.655 173.455,168.655 174.72,169.92 174.72,176.856 175.172,177.308 175.172,179.267 175.05,179.39 v1(175.05,179.43)
USB4_RX2_P: CO503.11 CO504.11 | length 78.1
  Bottom Layer w0.15: CO504.11 134.125,151.35 134.003,151.473 134.003,151.477 134.003,152.593 cw(c134.331,152.593) 134.331,152.922 135.676,152.922 ccw(c135.676,153.506) 135.676,154.09 134.247,154.09 cw(c134.247,154.419) 134.247,154.748 135.676,154.748 ccw(c135.676,155.332) 135.676,155.916 134.247,155.916 cw(c134.247,156.245) 134.247,156.574 135.084,156.574 ccw(c135.084,157.158) 135.084,157.742 134.331,157.742 cw(c134.331,158.071) 134.003,158.071 134.003,158.908 134.003,166.603 135.8,168.4 173.561,168.4 174.975,169.814 174.975,176.75 175.427,177.203 175.427,179.267 175.55,179.39 v1(175.55,179.43)
USB4_TX1_N: CO503.3 CO504.3 | length 78.1
  Bottom Layer w0.15: CO504.3 130.125,151.35 130.003,151.473 130.003,151.507 130.003,153.535 ccw(c129.419,153.535) 129.419,154.119 128.072,154.119 cw(c128.072,154.448) 128.072,154.777 129.453,154.777 ccw(c129.453,155.361) 129.453,155.945 128.072,155.945 cw(c128.072,156.274) 128.072,156.603 129.453,156.603 ccw(c129.453,157.187) 129.453,157.771 128.436,157.771 cw(c128.436,158.1) 128.436,158.429 129.419,158.429 ccw(c129.419,159.013) 130.003,159.013 130.003,161.058 130.003,168.703 133.2,171.9 169.861,171.9 171.88,173.919 171.88,176.856 171.428,177.308 171.428,179.267 171.55,179.39 v1(171.55,179.43)
USB4_TX1_P: CO503.2 CO504.2 | length 78.1
  Bottom Layer w0.15: CO504.2 129.625,151.35 129.748,151.473 129.748,151.507 129.748,153.535 ccw(c129.419,153.535) 129.419,153.864 128.072,153.864 cw(c128.072,154.448) 128.072,155.032 129.453,155.032 ccw(c129.453,155.361) 129.453,155.69 128.072,155.69 cw(c128.072,156.274) 128.072,156.858 129.453,156.858 ccw(c129.453,157.187) 129.453,157.516 128.436,157.516 cw(c128.436,158.1) 128.436,158.684 129.419,158.684 ccw(c129.419,159.013) 129.748,159.013 129.748,161.058 129.748,168.808 133.094,172.155 169.755,172.155 171.625,174.025 171.625,176.75 171.172,177.203 171.172,179.267 171.05,179.39 v1(171.05,179.43)
USB4_TX2_N: CO503.23 CO504.23 | length 78
  Top Layer w0.15: v1(133.875,149.6) 133.875,149.64 133.997,149.763 133.997,151.465 133.997,152.581 cw(c134.581,152.581) 134.581,153.165 135.786,153.165 ccw(c135.786,153.494) 135.786,153.823 134.486,153.823 cw(c134.486,154.407) 134.486,154.991 135.786,154.991 ccw(c135.786,155.32) 135.786,155.649 134.486,155.649 cw(c134.486,156.233) 134.486,156.817 135.349,156.817 ccw(c135.349,157.146) 135.349,157.475 134.581,157.475 cw(c134.581,158.059) 133.997,158.059 133.997,158.765 133.997,158.779 133.997,158.854 ccw(c133.668,158.854) 133.668,159.183 133.641,159.183 cw(c133.641,159.512) 133.312,159.512 cw(c133.641,159.512) 133.641,159.841 133.668,159.841 ccw(c133.668,160.17) 133.997,160.17 133.997,160.606 133.997,166.958 135.739,168.7 173.5,168.7 174.72,169.92 174.72,176.856 175.072,177.208 175.072,177.748 CO503.23
USB4_TX2_P: CO503.22 CO504.22 | length 78.1
  Top Layer w0.15: v1(134.375,149.6) 134.375,149.64 134.252,149.763 134.252,151.465 134.252,152.581 cw(c134.581,152.581) 134.581,152.91 135.786,152.91 ccw(c135.786,153.494) 135.786,154.078 134.486,154.078 cw(c134.486,154.407) 134.486,154.736 135.786,154.736 ccw(c135.786,155.32) 135.786,155.904 134.486,155.904 cw(c134.486,156.233) 134.486,156.562 135.349,156.562 ccw(c135.349,157.146) 135.349,157.73 134.581,157.73 cw(c134.581,158.059) 134.252,158.059 134.252,158.765 134.252,158.779 134.252,159.512 cw(c134.581,159.512) 134.581,159.841 ccw(c134.582,160.17) 134.911,160.17 ccw(c134.582,160.17) 134.582,160.499 cw(c134.581,160.828) 134.252,160.828 134.252,161.311 134.252,166.852 135.845,168.445 173.606,168.445 174.975,169.814 174.975,176.75 175.375,177.15 175.375,177.32 175.55,177.495 CO503.22
pads on no net: CO303.0 CO303.8 CO303.28 CO304.8 CO304.28 CO403.0 CO403.8 CO403.28 CO404.8 CO404.28 CO503.0 CO503.8 CO503.28 CO504.8 CO504.28 Fid1.1 Fid2.1 Fid3.1 Fid4.1

## Polygon pours and split planes (outlines as drawn)
GND on Layer 7 "GND_L07_P016" (solid, pour order 16): 24,148 24,198 186,198 186,148
GND on Layer 6 "GND_L06_P017" (solid, pour order 17): 24,148 24,198 186,198 186,148
GND on Layer 5 "GND_L05_P018" (solid, pour order 18): 24,148 24,198 186,198 186,148
GND on Layer 4 "GND_L04_P019" (solid, pour order 19): 24,148 24,198 186,198 186,148
GND on Layer 3 "GND_L03_P020" (solid, pour order 20): 24,148 24,198 186,198 186,148
GND on Layer 2 "GND_L02_P021" (solid, pour order 21): 24,148 24,198 186,198 186,148
GND on Top Layer "GND_L01_P022" (solid, pour order 22): 24,148 24,198 186,198 186,148
GND on Bottom Layer "GND_L08_P015" (solid, pour order 15): 24,148 24,198 186,198 186,148

## Silkscreen, mask and mechanical layers (free items; w line width, h text height)
Top Overlay:
  text "Position 3 / USB2" at 33.825,172.517 h1.5
  text "Position 4 / USB3" at 102.125,172.517 h1.5
  text "Position 5 / USB4" at 170.425,172.517 h1.5
  text "Grid - part 3 of 3" at 49.406,169.056 h3
  text "V.Rev" at 49.406,166.056 h3
Board Shape:
  the board outline again, w0.025

## Text inside footprints (layer, text, board x,y; h text height)
"Logo FxLand1": Top Overlay "Fx.Land" at 125.755,176.501 h5